# Altium PCB arabaKonsolPCB.PcbDoc
Units mm, origin at the board's own origin, x right, y up, seen from the top; angles counter-clockwise.
Board outline 180 x 67 mm, 2 copper layers (Top Layer, Bottom Layer); 55 components, 43 nets, 110 pads, 2 vias.
Unrouted connection lines stored in the file: 1.
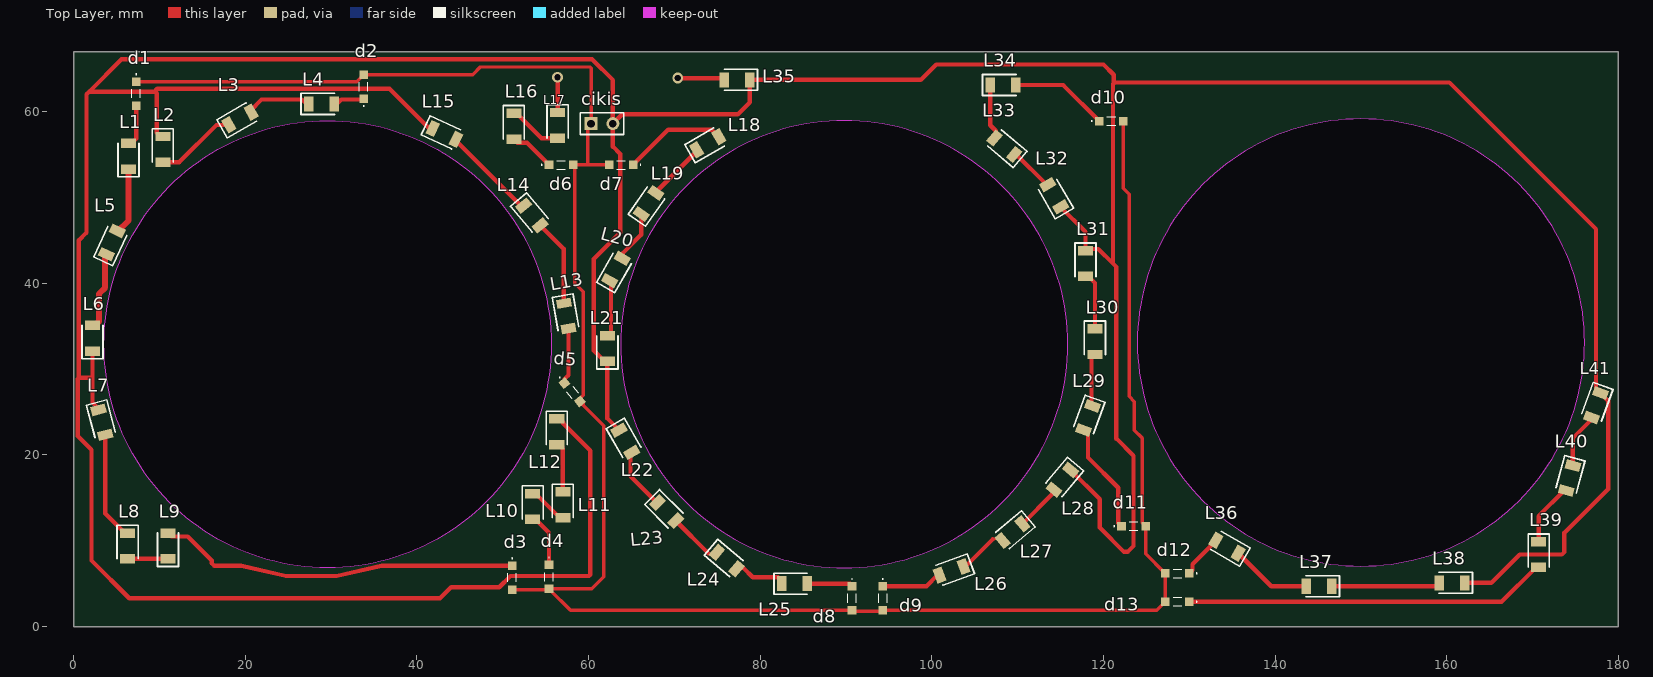
[diagram p0: Top Layer view]
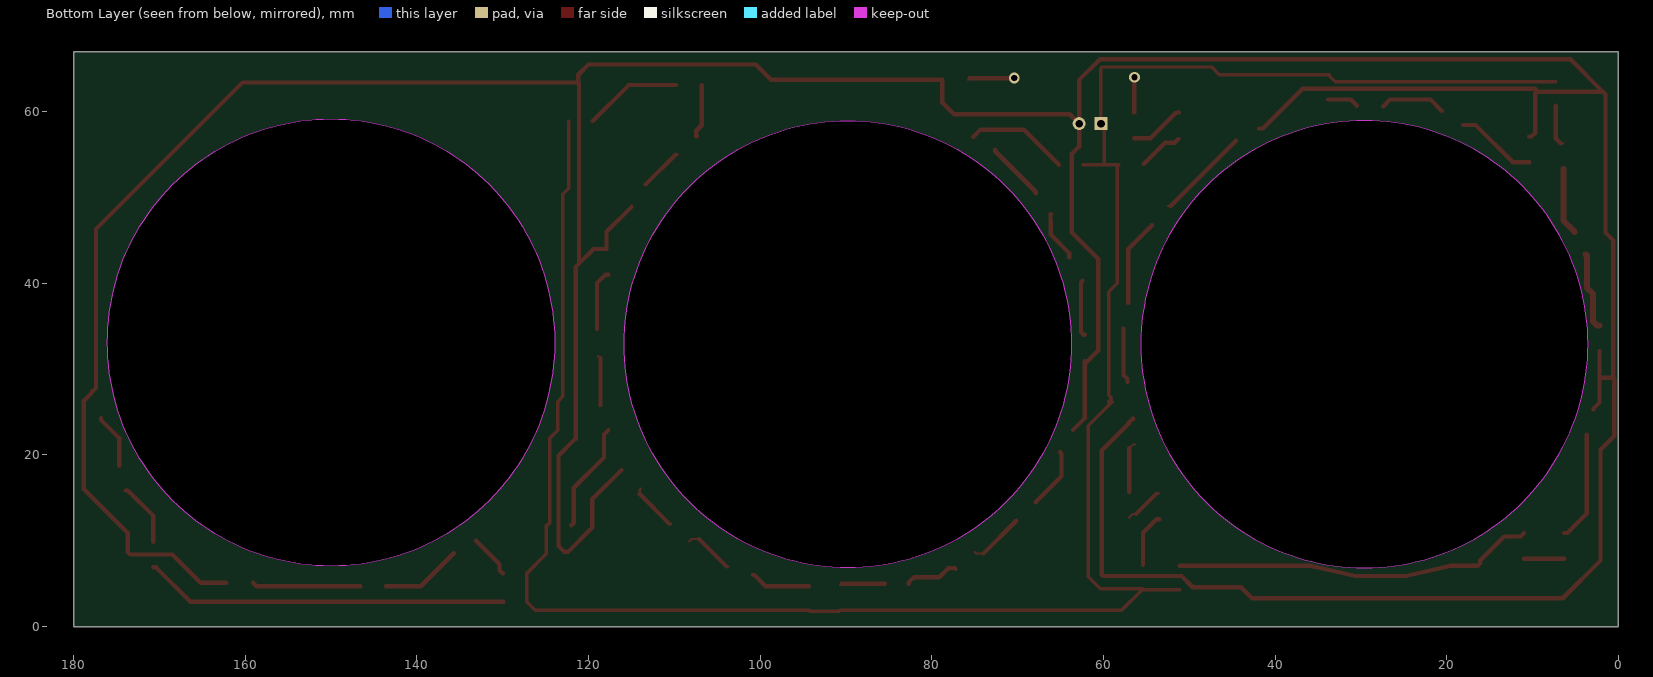
[diagram p1: Bottom Layer view, seen from below]

## Layer stack, top to bottom
Top Solder: solder mask 0.0102, Solder Resist, Dk 3.5
Top Layer: signal copper 0.0356
Dielectric 1: dielectric 0.32, FR-4, Dk 4.8
Bottom Layer: signal copper 0.0356
Bottom Solder: solder mask 0.0102, Solder Resist, Dk 3.5

## Board outline
0,0 180,0 180,67 0,67
cut-out: 123.946,33.1 ccw(c150,33.1) 150,7.046 ccw(c150,33.1) 176.054,33.1 ccw(c150,33.1) 150,59.154 ccw(c150,33.1)
cut-out: 63.746,32.9 ccw(c89.8,32.9) 89.8,6.846 ccw(c89.8,32.9) 115.854,32.9 ccw(c89.8,32.9) 89.8,58.954 ccw(c89.8,32.9)
cut-out: 29.6,6.846 cw(c29.6,32.9) 3.546,32.9 cw(c29.6,32.9) 29.6,58.954 cw(c29.6,32.9) 55.654,32.9 cw(c29.6,32.9)

## Design rules (kind name [scope] priority, off if disabled: settings)
Clearance [All] p1: gap=0.254 ignorepadtopadclearanceinfootprint=FALSE except(0: Arc-Hole Track-Hole SMDPad-Hole THPad-Hole Via-Hole Fill-Hole Poly-Hole Region-Hole Text-Hole)
PolygonConnect [All] p1: connectstyle=Relief reliefconductorwidth=0.254 reliefentries=4 polygonreliefangle="90 Angle" airgapwidth=0.254
RoutingVias [All] p1: holewidth=0.711 width=1.27 viastyle="Through Hole" minholewidth=0.711 minwidth=1.27 maxholewidth=0.711 maxwidth=1.27
SolderMaskExpansion [All] p1: expansion=0.102 istentingtop=FALSE
Width [All] p1: maxlimit=0.254 minlimit=0.254 preferedwidth=0.254
30 further rules are at their usual default settings.

## Components (designator, comment, footprint, x,y, rotation, side; value= is the part's Value field where it differs from the comment)
cikis "Header 2" HDR1X2 60.3,58.6 r0 top
d1 "12-21_S2C-FR2S2L_2C" 1221S2CFR2S2L2C 7.3,62.1 r270 top
d2 "12-21_S2C-FR2S2L_2C" 1221S2CFR2S2L2C 33.8,62.9 r90 top
d3 "12-21_S2C-FR2S2L_2C" 1221S2CFR2S2L2C 51.1,5.7 r270 top
d4 "12-21_S2C-FR2S2L_2C" 1221S2CFR2S2L2C 55.4,5.8 r270 top
d5 "12-21_S2C-FR2S2L_2C" 1221S2CFR2S2L2C 58.1,27.3 r310 top
d6 "12-21_S2C-FR2S2L_2C" 1221S2CFR2S2L2C 56.8,53.8 r0 top
d7 "12-21_S2C-FR2S2L_2C" 1221S2CFR2S2L2C 63.8,53.8 r180 top
d8 "12-21_S2C-FR2S2L_2C" 1221S2CFR2S2L2C 90.7,3.3 r270 top
d9 "12-21_S2C-FR2S2L_2C" 1221S2CFR2S2L2C 94.3,3.3 r270 top
d10 "12-21_S2C-FR2S2L_2C" 1221S2CFR2S2L2C 120.9,58.9 r0 top
d11 "12-21_S2C-FR2S2L_2C" 1221S2CFR2S2L2C 123.5,11.7 r0 top
d12 "12-21_S2C-FR2S2L_2C" 1221S2CFR2S2L2C 128.6,6.2 r180 top (schematic designator LED12)
d13 "12-21_S2C-FR2S2L_2C" 1221S2CFR2S2L2C 128.6,2.9 r180 top (schematic designator LED13)
L1 "OIS-150-1200p-X-T" LEDC3216X120N 6.4,54.8 r90 top
L2 "OIS-150-1200p-X-T" LEDC3216X120N 10.4,55.6 r270 top
L3 "OIS-150-1200p-X-T" LEDC3216X120N 19.4,59.2 r30 top
L4 "OIS-150-1200p-X-T" LEDC3216X120N 28.9,60.9 r0 top
L5 "OIS-150-1200p-X-T" LEDC3216X120N 4.466,44.741 r65 top
L6 "OIS-150-1200p-X-T" LEDC3216X120N 2.2,33.6 r90 top
L7 "OIS-150-1200p-X-T" LEDC3216X120N 3.3,23.8 r285 top
L8 "OIS-150-1200p-X-T" LEDC3216X120N 6.3,9.4 r270 top
L9 "OIS-150-1200p-X-T" LEDC3216X120N 11,9.4 r90 top
L10 "OIS-150-1200p-X-T" LEDC3216X120N 53.5,14 r270 top
L11 "OIS-150-1200p-X-T" LEDC3216X120N 57,14.2 r270 top
L12 "OIS-150-1200p-X-T" LEDC3216X120N 56.3,22.7 r270 top
L13 "OIS-150-1200p-X-T" LEDC3216X120N 57.4,36.2 r280 top
L14 "OIS-150-1200p-X-T" LEDC3216X120N 53.4,47.9 r310 top
L15 "OIS-150-1200p-X-T" LEDC3216X120N 43.2,57.4 r335 top
L16 "OIS-150-1200p-X-T" LEDC3216X120N 51.3,58.3 r270 top
L17 "OIS-150-1200p-X-T" LEDC3216X120N 56.4,58.4 r270 top
L18 "OIS-150-1200p-X-T" LEDC3216X120N 73.9,56.3 r30 top
L19 "OIS-150-1200p-X-T" LEDC3216X120N 67,49.3 r55 top
L20 "OIS-150-1200p-X-T" LEDC3216X120N 63.2,41.6 r60 top
L21 "OIS-150-1200p-X-T" LEDC3216X120N 62.2,32.4 r90 top
L22 "OIS-150-1200p-X-T" LEDC3216X120N 64.3,21.6 r300 top
L23 "OIS-150-1200p-X-T" LEDC3216X120N 69.1,13.4 r315 top
L24 "OIS-150-1200p-X-T" LEDC3216X120N 76.1,7.7 r320 top
L25 "OIS-150-1200p-X-T" LEDC3216X120N 84,5 r0 top
L26 "OIS-150-1200p-X-T" LEDC3216X120N 102.3,6.5 r200 top
L27 "OIS-150-1200p-X-T" LEDC3216X120N 109.4,11 r220 top
L28 "OIS-150-1200p-X-T" LEDC3216X120N 115.2,17.1 r230 top
L29 "OIS-150-1200p-X-T" LEDC3216X120N 118.2,24.3 r250 top
L30 "OIS-150-1200p-X-T" LEDC3216X120N 119,33.2 r270 top
L31 "OIS-150-1200p-X-T" LEDC3216X120N 117.9,42.3 r270 top
L32 "OIS-150-1200p-X-T" LEDC3216X120N 114.25,50.201 r120 top
L33 "OIS-150-1200p-X-T" LEDC3216X120N 108.451,55.964 r140 top
L34 "OIS-150-1200p-X-T" LEDC3216X120N 108.3,63.1 r0 top
L35 "OIS-150-1200p-X-T" LEDC3216X120N 77.3,63.7 r180 top
L36 "OIS-150-1200p-X-T" LEDC3216X120N 134.4,9.3 r150 top
L37 "OIS-150-1200p-X-T" LEDC3216X120N 145.1,4.7 r180 top
L38 "OIS-150-1200p-X-T" LEDC3216X120N 160.6,5.1 r180 top
L39 "OIS-150-1200p-X-T" LEDC3216X120N 170.7,8.4 r270 top
L40 "OIS-150-1200p-X-T" LEDC3216X120N 174.3,17.3 r255 top
L41 "OIS-150-1200p-X-T" LEDC3216X120N 177.387,25.79 r250 top

## Footprints (in the part's own frame and the unit in brackets; to place one, negate y for a bottom-side part, rotate by r counter-clockwise, add the part's x,y. Pads: shape width x height; smd on the part's side, far side on the other; paste and mask are expansions set on the pad)
1221S2CFR2S2L2C [mm]
  rect 1x1 smd: 1(-1.4,0) 2(1.4,0)
  silkscreen extent -2.3,-0.5 0.5,0.5, body extent -1.5,-0.5 1.5,0.5, height 1.89
HDR1X2 [mm] "Connector; Header; 2 Position"
  rect 1.5x1.5 hole 0.9: 1(0,0)
  round 1.5 hole 0.9: 2(2.54,0)
  silkscreen extent -1.27,-1.27 3.81,1.27
LEDC3216X120N [mm]
  rect 1.1x1.75 smd: 1(-1.5,0) 2(1.5,0)
  silkscreen extent -2.4,-1.22 1.5,1.22

## Part data
cikis: "Header, 2-Pin", LatestRevisionDate=17-Jul-2002, LatestRevisionNote="Re-released for DXP Platform.", Publisher="Altium Limited"
d1 d2 d3 d4 d5 d6 d7 d8 d9 d10 d11 d12 d13: "LED", Manufacturer_Name="EVERLIGHT ELECTRONICS", Manufacturer_Part_Number=12-21/S2C-FR2S2L/2C, Datasheet Link=https://datasheet.lcsc.com/szlcsc/1901141904_Everlight-Elec-12-21-S2C-FR2S2L-2C_C183856.pdf, Height=2.2mm
L1 L2 L3 L4 L5 L6 L7 L8 L9 L10 L11 L12 L13 L14 L15 L16 L17 L18 L19 L20 L21 L22 L23 L24 L25 L26 L27 L28 L29 L30 L31 L32 L33 L34 L35 L36 L37 L38 L39 L40 L41: "LED", Manufacturer_Name="OSA Opto", Datasheet Link=http://uk.rs-online.com/web/p/products/1736249, Height=1.2mm, Manufacturer_Part_Number=OIS-150-1200p-X-T

## Via types
v1: diameter 1.27, hole 0.711, Top Layer to Bottom Layer, 2 vias

## Nets (pads, with @x,y where several pads share a name; then routed paths per layer and width w, separated by ;. In a path a pad name is that pad's centre, name@x,y a point inside that pad or via, vN(x,y) a via of type N, cw(c..) or ccw(c..) an arc to the next point about the centre after c; other vN are vias at no path point)
5v: cikis.1 d1.1 d2.2 d3.2 d4.2 d5.2 d6.2 d7.2 d8.2 d9.2 d10.2 d11.2 d12.2 d13.2 | length 261.9
  Top Layer w0.4: d1.1 33,63.5 33.7,64.2 d2.2@33.7,64.3 ; d2.2 46.492,64.3 47.392,65.2 60.151,65.2 60.3,65.051 cikis.1 59.9,58.2 59.9,53.9 ; d3.2 55.3,4.3 d4.2 60.4,4.4 61.8,5.8 61.8,23.4 59.4,25.8 ; d4.2@55.5,4.3 57.9,1.9 d8.2 90.8,1.8 d9.2@94.2,1.8 ; d5.2@59,26.2 59.4,25.8 ; d7.2 d6.2 58.4,53.6 58.4,40.013 59.4,39.013 59.4,26.966 59.072,26.638 59.072,26.555 59.4,26.228 59.4,25.8 ; d9.2 126.2,1.9 d13.2 d12.2 ; d10.2 122.3,51.053 123,50.353 123,26.813 123.6,26.213 123.6,22.9 124.527,21.973 124.527,12.073 124.8,11.8 d11.2@124.9,11.8 ; d11.2 124.9,8.5 127.1,6.3 d12.2@127.2,6.3
GND: cikis.2 L2.1 L6.1 L7.1 L12.1 L15.1 L21.1 L22.1 L28.1 L31.1 L32.1 L35.1 L38.1 L41.1 | length 560
  Top Layer w0.5: 0.6,28.9 0.6,28.951 ; L6.1 2.2,29 ; L7.1@2.9,25.3 2.9,25.409 2.2,26.109 2.2,29 ; L2.1 10.123,57.1 9.7,57.523 9.7,62.151 9.551,62.3 9.4,62.3 ; L15.1 41.438,58.034 36.816,62.656 9.756,62.656 9.4,62.3 ; L12.1@56.5,24.2 56.625,24.2 57.048,23.777 57.048,23.652 60.2,20.5 60.2,6.049 60.051,5.9 50.9,5.9 49.592,4.592 43.992,4.592 42.7,3.3 6.5,3.3 2.1,7.7 2.1,20.6 0.5,22.2 0.5,28.851 0.6,28.951 ; L21.1@62.1,30.8 61.975,30.8 60.6,32.175 60.6,42.825 63.7,45.925 63.7,55.063 62.84,55.923 cikis.2 ; L21.1 62.2,24.249 L22.1 ; L32.1 117.9,46.002 117.9,44 119.4,44 121.1,42.3 ; L28.1 119.562,14.851 119.562,11.538 122.397,8.703 122.811,8.703 123.5,9.392 123.5,19.9 121.5,21.9 121.5,41.9 121.1,42.3 ; 121.2,63.3 121.2,63.351 ; L38.1@162.2,5.1 165.193,5.1 168.493,8.4 173.407,8.4 173.7,8.693 173.7,10.936 178.8,16.036 178.8,26.3 L41.1 ; L41.1@177.9,27.3 177.393,27.807 177.393,46.307 160.3,63.4 121.249,63.4 121.2,63.351 ; 0.6,28.951 0.649,29 2.2,29 ; 0.6,28.951 0.6,45 1.5,45.9 1.5,62 1.6,62.1 1.8,62.3 ; 1.8,62.3 5.6,66.1 60.41,66.1 62.84,63.67 cikis.2 ; 1.8,62.3 9.4,62.3 ; cikis.2 63.94,59.7 77.4,59.7 78.8,61.1 L35.1 98.712,63.7 100.512,65.5 120,65.5 121.2,64.3 121.2,63.351 ; 121.1,42.3 121.1,63.251 121.2,63.351
Netd1_2: d1.2 L1.2 | length 5
  Top Layer w0.254: L1.2 L1.2@6.725,56.3
  Top Layer w0.5: L1.2@6.725,56.3 7.3,56.875 d1.2
Netd2_1: d2.1 L4.2 | length 3.6
  Top Layer w0.5: L4.2@30.5,60.7 31.2,61.4 d2.1@33.8,61.4
Netd3_1: d3.1 L9.2 | length 42.1
  Top Layer w0.5: L9.2 11.4,10.5 13.3,10.5 16.1,7.7 16.1,7.393 16.246,7.246 16.393,7.1 19.502,7.1 19.555,7.088 ; 19.556,7.088 24.76,5.9 30.655,5.9 35.912,7.1 d3.1
Netd4_1: d4.1 L10.2 | length 6.3
  Top Layer w0.5: L10.2 53.825,12.5 55.4,10.925 d4.1
Netd5_1: d5.1 L13.2 | length 6.4
  Top Layer w0.5: d5.1@57.2,28.5 57.2,28.836 57.66,29.296 L13.2
Netd6_1: d6.1 L16.2 | length 5.2
  Top Layer w0.5: L16.2 51.723,56.377 52.823,56.377 d6.1@55.3,53.9
Netd7_1: d7.1 L18.2 | length 12
  Top Layer w0.5: d7.1 69.3,57.9 74.324,57.9 75.174,57.05 L18.2
Netd8_1: d8.1 L25.2 | length 5.3
  Top Layer w0.254: d8.1@90.5,5 d8.1@90.7,4.8
  Top Layer w0.5: L25.2 d8.1@90.5,5
Netd9_1: d9.1 L26.2 | length 7
  Top Layer w0.5: d9.1 99.379,4.7 100.679,6 L26.2@100.8,6
Netd10_1: d10.1 L34.2 | length 11.4
  Top Layer w0.5: L34.2 115.3,63.1 d10.1
Netd11_1: d11.1 L29.2 | length 12.9
  Top Layer w0.5: L29.2 118.194,22.383 118.194,19.706 121.727,16.173 121.727,12.073 d11.1@122,11.8
Netd12_1: d12.1 L36.2 | length 5.1
  Top Layer w0.5: d12.1 130.373,6.573 130.373,7.273 L36.2@133.1,10
Netd13_1: d13.1 L39.2 | length 42.5
  Top Layer w0.5: d13.1@129.9,2.9 166.375,2.9 170.375,6.9 L39.2
NetL1_1: L1.1 L5.2 | length 7.8
  Top Layer w0.7: L5.2@5.1,46 6.4,47.3 L1.1
NetL2_2: L2.2 L3.1 | length 9.5
  Top Layer w0.5: L2.2 12.3,54.1 16.65,58.45 L3.1
NetL3_2: L3.2 L4.1 | length 7.7
  Top Layer w0.5: L3.2@20.6,60.1 21.9,61.4 26.6,61.4 L4.1@27.4,60.6
NetL5_1: L5.1 L6.2 | length 9.1
  Top Layer w0.7: L6.2 2.525,35.1 2.948,35.523 2.948,38.756 3.673,39.481 3.673,43.222 L5.1
NetL7_2: L7.2 L8.1 | length 12.7
  Top Layer w0.5: L7.2 3.688,13.187 5.975,10.9 L8.1
NetL8_2: L8.2 L9.1 | length 4.7
  Top Layer w0.5: L8.2 L9.1
NetL10_1: L10.1 L11.2 | length 4.7
  Top Layer w0.254: L10.1 L10.1@53.825,15.5 ; L11.2@56.202,13.123 56.577,13.123 L11.2
  Top Layer w0.5: L10.1@53.825,15.5 L11.2@56.202,13.123
NetL11_1: L11.1 L12.2 | length 6
  Top Layer w0.254: L12.2 56.577,21.2 L12.2@57,20.777
  Top Layer w0.5: L11.1 L12.2@57,20.777
NetL13_1: L13.1 L14.2 | length 10.2
  Top Layer w0.5: L14.2 57.1,44.015 L13.1@57.1,37.7
NetL14_1: L14.1 L15.2 | length 11.2
  Top Layer w0.254: L15.2@44.559,56.609 L15.2 ; L14.1@52.168,49 L14.1@52.5,49
  Top Layer w0.5: L15.2@44.559,56.609 L14.1@52.168,49
NetL16_1: L16.1 L17.2 | length 6.4
  Top Layer w0.5: L16.1@51.2,59.9 51.525,59.9 54.525,56.9 L17.2
NetL17_1: L17.1 L35.2 | length 9.6
  Top Layer w0.254: v1@70.4,64 v1@70.5,63.9 ; L35.2@75.6,63.9 L35.2
  Top Layer w0.5: L17.1 v1(56.4,64) ; v1@70.5,63.9 L35.2@75.6,63.9
  other v1: 70.4,63.9
NetL18_1: L18.1 L19.2 | length 7
  Top Layer w0.5: L19.2 L19.2@67.899,50.49 ; L19.2@67.9,50.6 67.9,50.674 72.601,55.375 L18.1
NetL19_1: L19.1 L20.2 | length 6
  Top Layer w0.5: L20.2@64,43 64,43.525 66.14,45.665 66.14,47.222 66.164,47.246 66.164,48.047 L19.1
NetL20_1: L20.1 L21.2 | length 6.6
  Top Layer w0.5: L21.2@62.2,34 62.289,34 62.613,34.323 62.613,40.138 L20.1
NetL22_2: L22.2 L23.1 | length 7.1
  Top Layer w0.5: L22.2 64.888,20.138 64.888,17.512 L23.1@67.9,14.5
NetL23_2: L23.2 L24.1 | length 6.5
  Top Layer w0.254: 73.989,8.511 74.811,8.511 L24.1@75,8.7
  Top Layer w0.5: L23.2 73.989,8.511
NetL24_2: L24.2 L25.1 | length 6.3
  Top Layer w0.5: L24.2 77.35,6.837 78.053,6.837 79.142,5.748 82.077,5.748 82.7,5.125 L25.1@82.7,5
NetL26_1: L26.1 L27.2 | length 6
  Top Layer w0.254: L26.1 L26.1@103.934,7.013 ; 107.111,10.189 108.011,10.189 L27.2@108.3,9.9
  Top Layer w0.5: L26.1@103.934,7.013 107.111,10.189
NetL27_1: L27.1 L28.2 | length 5.6
  Top Layer w0.254: L28.2@113.9,16.1 114.034,15.966 L28.2@114.034,15.449
  Top Layer w0.5: L27.1 L28.2@114.034,15.449
NetL29_1: L29.1 L30.2 | length 6
  Top Layer w0.254: L29.1@118.602,25.821 L29.1 ; L30.2@118.602,31.277 118.825,31.5 L30.2@118.9,31.5
  Top Layer w0.5: L29.1@118.602,25.821 L30.2@118.602,31.277
NetL30_1: L30.1 L31.2 | length 7
  Top Layer w0.5: L31.2@117.7,41 118.025,41 119,40.025 L30.1
NetL32_2: L32.2 L33.1 | length 5.3
  Top Layer w0.254: L33.1 L33.1@109.845,55 ; L32.2@113.345,51.5 L32.2
  Top Layer w0.5: L33.1@109.845,55 L32.2@113.345,51.5
NetL33_2: L33.2 L34.1 | length 6.3
  Top Layer w0.5: L34.1 106.8,58.416 107.443,57.773 107.443,57.143 L33.2@107.4,57.1
NetL36_1: L36.1 L37.2 | length 9.5
  Top Layer w0.5: L36.1 139.549,4.7 L37.2
NetL37_1: L37.1 L38.2 | length 12.7
  Top Layer w0.5: L37.1 158.7,4.7 L38.2
NetL39_1: L39.1 L40.2 | length 7.4
  Top Layer w0.5: L39.1 170.7,12.869 173.682,15.851 L40.2
NetL40_1: L40.1 L41.2 | length 6.4
  Top Layer w0.5: L40.1 174.688,21.971 176.8,24.082 L41.2@176.8,24.3